# Altium PCB SCOM_SENSOR_HAT.PcbDoc
Units mm, origin at the board's own origin, x right, y up, seen from the top; angles counter-clockwise.
Board outline 137.1 x 87.1 mm, 2 copper layers (L1, L2), stack 1.58 mm thick; 49 components, 79 nets, 165 pads, 0 vias.
Unrouted connection lines stored in the file: 86.
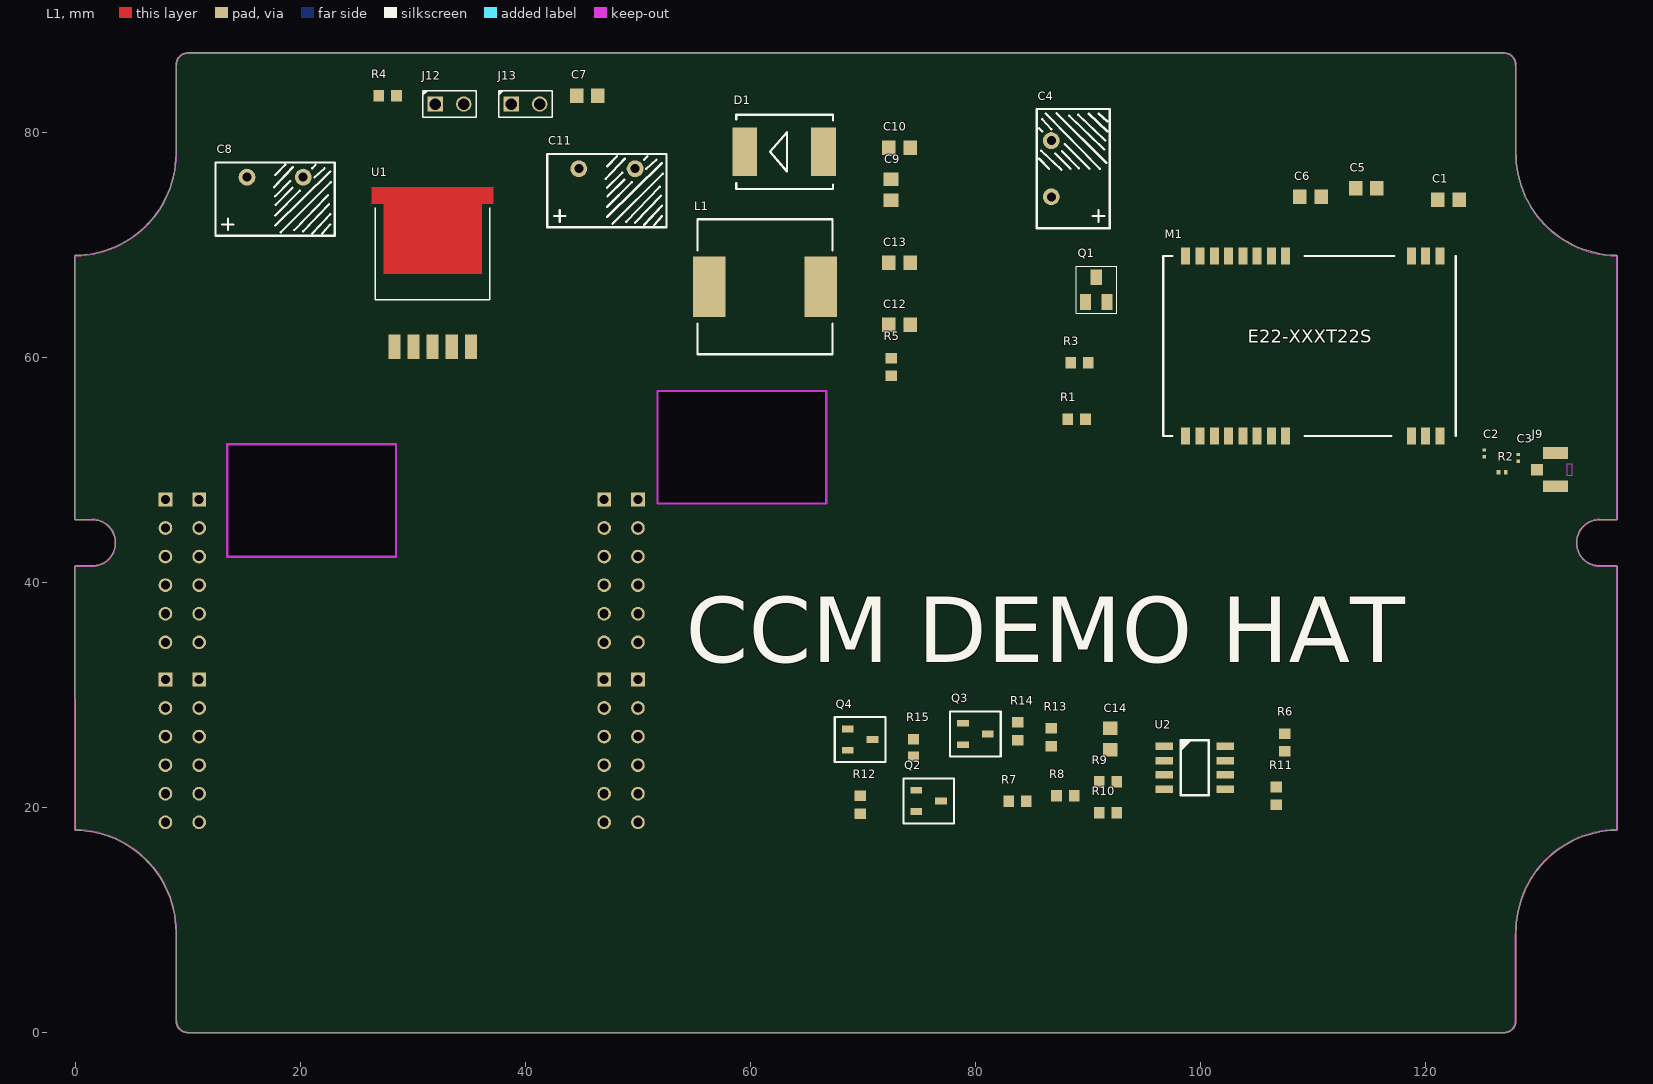
[diagram p0: L1 view]
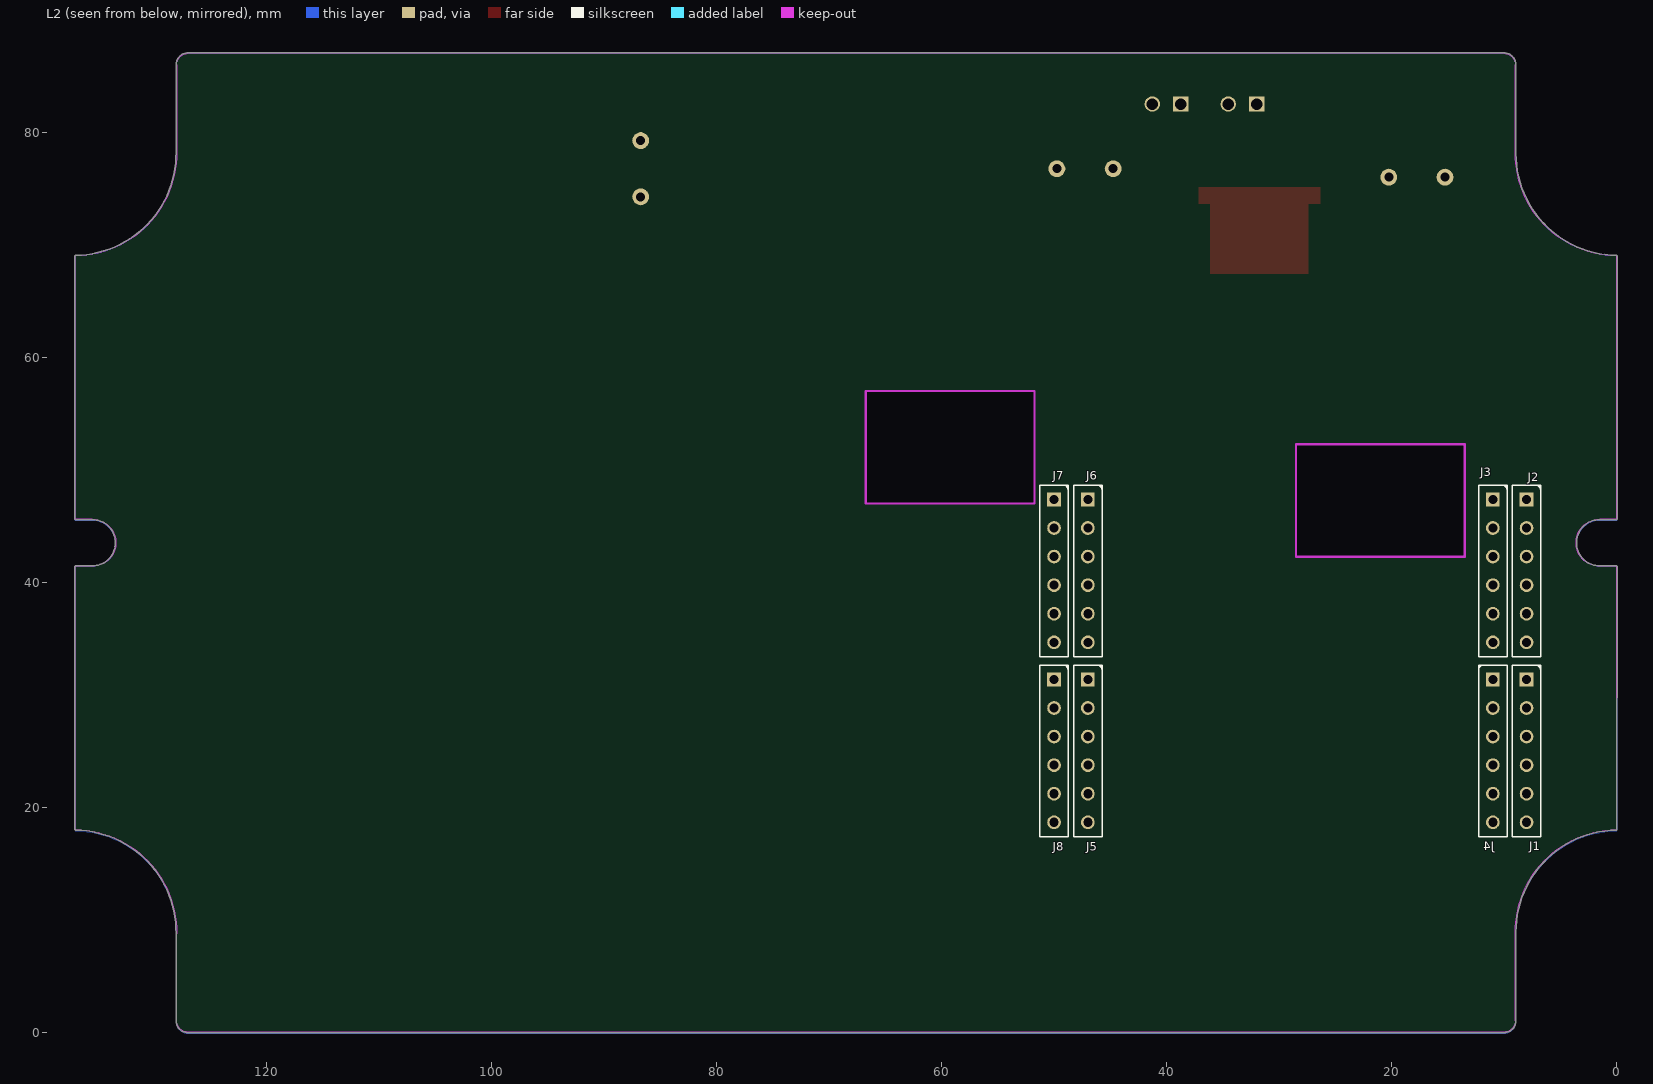
[diagram p1: L2 view, seen from below]

## Layer stack, top to bottom
Top Solder: solder mask 0.01, Solder Resist, Dk 3.5
L1: signal copper 0.035
Core: core 1.51, Core-044, Dk 4
L2: signal copper 0.035
Bottom Solder: solder mask 0.01, Solder Resist, Dk 3.5

## Board outline
-0.004,17.95 -0.05,41.4 0,41.45 1.5,41.45 ccw(c1.5,43.5) 3.55,43.5 ccw(c1.5,43.5) 1.5,45.55 0,45.55 -0.053,45.603 -0.053,69 -0.004,69.05 ccw(c-0.126,78.123) 8.947,78.124 8.947,78.247 8.947,85.997 8.95,86.014 cw(c10,86) 10,87.05 127,87.05 cw(c127,86) 128.05,86.014 128.053,85.997 128.054,78.247 ccw(c137.126,78.123) 137.003,69.051 137.05,68.983 137.05,45.6 137,45.55 135.5,45.55 ccw(c135.5,43.5) 135.5,41.45 137,41.45 137.05,41.4 137.05,18.017 137.004,17.95 ccw(c137.126,8.877) 128.053,8.754 128.053,1.003 128.05,0.986 cw(c127,1) 127,-0.05 10,-0.05 cw(c10,1) 8.95,0.986 8.947,1.003 8.947,8.753 8.947,8.877 ccw(c-0.126,8.877)
cut-out: 13.502,52.25 28.499,52.25 28.499,42.25 13.502,42.25
cut-out: 51.753,57 66.75,57 66.75,47 51.753,47

## Design rules (kind name [scope] priority, off if disabled: settings)
Clearance [All] p1: gap=0.254 ignorepadtopadclearanceinfootprint=FALSE except(0.178: Track-Track Track-SMDPad SMDPad-SMDPad; 0.5: Arc-Poly Track-Poly SMDPad-Poly; 1: THPad-Poly Poly-Poly Poly-Region)
Height [All] p1: minheight=0 maxheight=55 prefheight=12.7
PolygonConnect [All] p1: connectstyle=Relief reliefconductorwidth=0.254 reliefentries=4 polygonreliefangle="90 Angle" airgapwidth=0.254
RoutingVias [All] p1: holewidth=0.711 width=1.27 viastyle="Through Hole" minholewidth=0.1 minwidth=0.1 maxholewidth=0.711 maxwidth=1.27
SolderMaskExpansion [All] p1: expansion=0.102 istentingtop=FALSE
SupplyNets "Schematic Supply Nets_3" [InNet('3V3')] p1: voltage=0.000
SupplyNets "Schematic Supply Nets_2" [InNet('12V0')] p2: voltage=0.000
SupplyNets "Schematic Supply Nets_1" [InNet('5V0')] p3: voltage=0.000
SupplyNets "Schematic Supply Nets" [InNet('GND')] p4: voltage=0.000
Width "Schematic Width Constraint" [InNet('NetC3_2')] p1: maxlimit=3.122 minlimit=3.122 preferedwidth=3.122 impedanceprofiledriven=TRUE impedanceprofileid={AFE54EE7-AFA3-4271-A65C-77413E7DE045} impedanceprofilevalue=50.000000 minimp=50.000000 maximp=50.000000 favimp=50.000000
Width [All] p2: maxlimit=2 minlimit=0.254 preferedwidth=0.5
29 further rules are at their usual default settings.

## Classes and differential pairs
net class U2_Nets: 5V0 485_A 485_B GND NetQ2_3 NetQ3_3 NetQ4_3
net class R15_Nets: 485_B GND
net class R14_Nets: 485_A 485_B
net class R13_Nets: 3V3 485_RX
net class R12_Nets: 3V3 485_TE
net class R11_Nets: 5V0 485_A
net class R10_Nets: 5V0 NetQ2_3
net class R9_Nets: 5V0 NetQ3_3
net class R8_Nets: 5V0 NetQ3_3
net class R7_Nets: 5V0 NetQ4_3
net class R6_Nets: 3V3 485_TX
net class Q4_Nets: 3V3 485_RX NetQ4_3
net class Q3_Nets: 3V3 485_TE NetQ3_3
net class Q2_Nets: 3V3 485_TX NetQ2_3
net class C14_Nets: 5V0 GND
component class RS485: C14 Q2 Q3 Q4 R6 R7 R8 R9 R10 R11 R12 R13 R14 R15 U2
net class U1_Nets: GND NetC7_1 NetC7_2 NetD1_1 NetR4_2
net class R5_Nets: GND NetR4_2
net class R4_Nets: NetC11_1 NetR4_2
net class L1_Nets: NetC11_1 NetD1_1
net class J13_Nets: 5V0 NetC11_1
net class J12_Nets: 12V0 NetC7_1
net class D1_Nets: GND NetD1_1
net class C13_Nets: GND NetC11_1
net class C12_Nets: GND NetC11_1
net class C11_Nets: GND NetC11_1
net class C10_Nets: GND NetC7_1
net class C9_Nets: GND NetC7_1
net class C8_Nets: GND NetC7_1
net class C7_Nets: NetC7_1 NetC7_2
net class R3_Nets: LORA_RST NetQ1_1
net class R2_Nets: LORA_ANT NetC3_2
net class R1_Nets: 5V0 NetC1_1
net class Q1_Nets: GND NetC1_1 NetQ1_1
net class M1_Nets: 5V0 GND LORA_ANT LORA_AUX LORA_M0 LORA_M1 LORA_RXD LORA_TXD NetC1_1 NetM1_3 NetM1_4 NetM1_5 NetM1_6 NetM1_7
net class J9_Nets: GND NetC3_2
net class C6_Nets: 5V0 GND
net class C5_Nets: 5V0 GND
net class C4_Nets: 5V0 GND
net class C3_Nets: GND NetC3_2
net class C2_Nets: GND LORA_ANT
net class C1_Nets: GND NetC1_1
net class ANT_50R: NetC3_2
component class LORA: C1 C2 C3 C4 C5 C6 J9 M1 Q1 R1 R2 R3
net class J8_Nets: NetJ8_1 NetJ8_2 NetJ8_3 NetJ8_4 NetJ8_5 NetJ8_6
net class J7_Nets: NetJ7_1 NetJ7_2 NetJ7_3 NetJ7_4 NetJ7_5 NetJ7_6
net class J6_Nets: NetJ6_1 NetJ6_2 NetJ6_3 NetJ6_4 NetJ6_5 NetJ6_6
net class J5_Nets: NetJ5_1 NetJ5_2 NetJ5_3 NetJ5_4 NetJ5_5 NetJ5_6
net class J4_Nets: NetJ4_1 NetJ4_2 NetJ4_3 NetJ4_4 NetJ4_5 NetJ4_6
net class J3_Nets: NetJ3_1 NetJ3_2 NetJ3_3 NetJ3_4 NetJ3_5 NetJ3_6
net class J2_Nets: NetJ2_1 NetJ2_2 NetJ2_3 NetJ2_4 NetJ2_5 NetJ2_6
net class J1_Nets: GND NetJ1_1 NetJ1_2 NetJ1_3 NetJ1_4 NetJ1_5
component class POWER: C7 C8 C9 C10 C11 C12 C13 D1 J1 J2 J3 J4 J5 J6 J7 J8 J12 J13 L1 R4 R5 U1

## Components (designator, comment, footprint, x,y, rotation, side; value= is the part's Value field where it differs from the comment)
C1 "MLCC_0805" CAPC2012X13L 122.05,74 r0 top value=1nF
C2 "ERP_102-1" CAPC0603X03L 125.25,51.45 r90 top value=NM
C3 "ERP_102-1" CAPC0603X03L 128.25,51.05 r90 top value=NM
C4 "ERP_102-2" "CAP_D10_H16_P5 - Flat" 86.75,76.75 r90 top value=220uF
C5 "MLCC_0805" CAPC2012X13L 114.75,75 r0 top value=1uF
C6 "MLCC_0805" CAPC2012X13L 109.8,74.25 r0 top value=100nF
C7 "MLCC_0805" CAPC2012X13L 45.499,83.25 r0 top value=1uF
C8 "ERP_102-2" "CAP_D10_H16_P5 - Flat" 17.75,76 r0 top value=220uF
C9 "MLCC_0805" CAPC2012X13L 72.5,74.88 r90 top value=1uF
C10 "MLCC_0805" CAPC2012X13L 73.25,78.63 r180 top value=100nF
C11 "ERP_102-2" "CAP_D10_H16_P5 - Flat" 47.25,76.75 r0 top value=220uF
C12 "MLCC_0805" CAPC2012X13L 73.25,62.88 r180 top value=1uF
C13 "MLCC_0805" CAPC2012X13L 73.25,68.38 r180 top value=100nF
C14 "MLCC_0805" CAPC2012X13L 92,26.05 r90 top value=100nF
D1 "ERP_104-3" DIOM6959X26L 63,78.25 r0 top value=SS54
J1 "6PX1R_M" 6PX1R_M_STK20 8,25 r90 bottom locked
J2 "6PX1R_M" 6PX1R_M_STK20 8,41 r90 bottom locked
J3 "6PX1R_M" 6PX1R_M_STK20 11,41 r90 bottom locked
J4 "6PX1R_M" 6PX1R_M_STK20 11,25 r90 bottom locked
J5 "6PX1R_M" 6PX1R_M_STK20 47,25 r90 bottom locked
J6 "6PX1R_M" 6PX1R_M_STK20 47,41 r90 bottom locked
J7 "6PX1R_M" 6PX1R_M_STK20 50,41 r90 bottom locked
J8 "6PX1R_M" 6PX1R_M_STK20 50,25 r90 bottom locked
J9 "ERP_148-1" uFL_50R 130.75,50 r270 top
J12 "2PX1R" 2PX1R 33.249,82.5 r0 top
J13 "2PX1R" 2PX1R 39.999,82.5 r0 top
L1 "ERP_103-3" IND_1212 61.3,66.25 r0 top value=47uH
M1 "E22-XXXT22S" E22-XXXT22S 110,61 r0 top value=E22-900T22S
Q1 "ERP_105-1" MMBT2222 90.75,66 r0 top value=MMBT2222A
Q2 "BSS138L" BSS138L 75.85,20.55 r0 top
Q3 "BSS138L" BSS138L 80,26.5 r0 top
Q4 "BSS138L" BSS138L 69.75,26 r0 top
R1 "ERP_101-1" RES_0603 89,54.5 r0 top value=10k
R2 "ERP_101-1" RESC0603X03L 126.825,49.75 r0 top value=0R
R3 "ERP_101-1" RES_0603 89.25,59.5 r0 top value=220R
R4 "ERP_101-1" RES_0603 27.749,83.25 r0 top value=10k
R5 "ERP_101-1" RES_0603 72.5,59.13 r90 top value=3k3
R6 "ERP_101-1" RES_0603 107.5,25.75 r90 top value=10k
R7 "ERP_101-1" RES_0603 83.75,20.5 r0 top value=10k
R8 "ERP_101-1" RES_0603 88,21 r0 top value=10k
R9 "ERP_101-1" RES_0603 91.79,22.25 r0 top value=10k
R10 "ERP_101-1" RES_0603 91.79,19.5 r180 top value=10k
R11 "ERP_101-1" RES_0603 106.75,21 r90 top value=20k
R12 "ERP_101-1" RES_0603 69.75,20.21 r90 top value=10k
R13 "ERP_101-1" RES_0603 86.75,26.21 r90 top value=10k
R14 "ERP_101-1" RES_0603 83.75,26.75 r90 top value=120R
R15 "ERP_101-1" RES_0603 74.5,25.25 r90 top value=20k
U1 "XL4015" XL4015 31.588,68.337 r90 top
U2 "SN75176A" SN75176A 99.5,23.5 r0 top

## Footprints (in the part's own frame and the unit in brackets; to place one, negate y for a bottom-side part, rotate by r counter-clockwise, add the part's x,y. Pads: shape width x height; smd on the part's side, far side on the other; paste and mask are expansions set on the pad)
2PX1R [mm]
  rect 1.37x1.37 hole 1.02: 1(-1.27,0)
  round 1.37 hole 1.02: 2(1.27,0)
  silkscreen extent -2.39,-1.17 2.39,1.17, body extent -2.54,-1.27 2.54,1.27, height 8.77
6PX1R_M_STK20 [mm]
  rect 1.22x1.22 / inner round 1.22 / far side rect 1.22x1.22 hole 0.81: 1(6.35,0)
  round 1.22 hole 0.81: 2(3.81,0) 3(1.27,0) 4(-1.27,0) 5(-3.81,0) 6(-6.35,0)
  silkscreen extent -7.62,-1.27 7.62,1.27, body extent -7.62,-1.2 7.62,1.2, height 18.11
BSS138L [mm]
  rect 1.05x0.6 smd: 1(-1.1,0.95) 2(-1.1,-0.95) 3(1.1,0)
  silkscreen extent -2.25,-2 2.25,2, body extent -1.2,-1.45 1.2,1.45, height 0.95
"CAP_D10_H16_P5 - Flat" [mm]
  round 1.5 hole 0.8: 1(-2.5,0) 2(2.5,0)
  silkscreen extent -5.3,-5.2 5.3,1.3, body extent -4.99,-18 5,1, height 10
CAPC0603X03L [mm] "Chip Capacitor, 2-Leads, Body 0.60x0.30mm, IPC High Density"
  rect 0.3x0.3 smd: 1(-0.3,0) 2(0.3,0)
  body extent -0.32,-0.17 0.32,0.17, height 0.3
CAPC2012X13L [mm] "Chip Capacitor, 2-Leads, Body 2.00x1.25mm, IPC High Density"
  rect 1.2x1.3 smd: 1(-0.95,0) 2(0.95,0)
  body extent -1.05,-0.63 1.05,0.63, height 1.26
DIOM6959X26L [mm] "Molded Diode, 2-Leads, Body 6.86x5.91mm, IPC High Density"
  rect 2.2x4.3 smd: 1(-3.5,0) 2(3.5,0)
  silkscreen extent -4.25,-3.3 4.35,3.3, body extent -3.92,-2.96 4.02,2.96, height 2.62
E22-XXXT22S [mm]
  rect 0.8x1.5 smd: 1(-11.3,-8) 2(-10.03,-8) 3(-8.76,-8) 4(-7.49,-8) 5(-6.22,-8) 6(-4.95,-8) 7(-3.68,-8) 8(-2.41,-8) 11(8.76,-8) 12(10.03,-8) 13(11.3,-8) 14(11.3,8) 15(10.03,8) 16(8.76,8) 19(-2.41,8) 20(-3.68,8) 21(-4.95,8) 22(-6.22,8) 23(-7.49,8) 24(-8.76,8) 25(-10.03,8) 26(-11.3,8)
  silkscreen extent -13.3,-8 12.7,8, body extent -13.25,-8 12.75,8, height 2.2
IND_1212 [mm]
  rect 2.9x5.4 smd: 1(-4.95,0) 2(4.95,0)
  silkscreen extent -6,-6 6,6, body extent -6,-6 6,6, height 8
MMBT2222 [mm]
  rect 1x1.4 smd: 1(-0.95,-1.1) 2(0.95,-1.1) 3(0,1.1)
  silkscreen extent -1.8,-2.1 1.8,2.1, body extent -1.45,-1.2 1.45,1.2, height 1.11
RES_0603 [mm]
  rect 0.94x1.02 smd: 1(-0.79,0) 2(0.79,0)
  body extent -0.8,-0.4 0.8,0.4, height 0.45
RESC0603X03L [mm] "Chip Resistor, 2-Leads, Body 0.60x0.30mm, IPC High Density"
  rect 0.35x0.4 smd: 1(-0.325,0) 2(0.325,0)
  body extent -0.32,-0.17 0.32,0.17, height 0.26
SN75176A [mm]
  rect 1.528x0.65 smd: 1(-2.711,1.905) 2(-2.711,0.635) 3(-2.711,-0.635) 4(-2.711,-1.905) 5(2.711,-1.905) 6(2.711,-0.635) 7(2.711,0.635) 8(2.711,1.905)
  silkscreen extent -1.25,-2.45 1.25,2.45, body extent -3.01,-2.45 3.01,2.45, height 1.63
uFL_50R [mm] "U.FL (UMCC), I-PEX MHFI Connector Receptacle, Male Pin 50 Ohms Surface Mount Solder"
  rect 1.05x2.2 smd: 1(-1.475,0.825) 2(1.475,0.825)
  rect 1x1.1 smd: 3(0,-0.825)
  L1 keep-out region: -0.5,1.825 0.5,1.825 0.5,2.325 -0.5,2.325
  body extent -1.5,-0.67 1.5,2.32, height 1.34
XL4015 [mm] "5A 180KHz 36V Buck DC to DC Converter"
  rect 2.16x1.07 smd: 1(-7.422,3.238) 2(-7.422,1.538) 3(-7.422,-0.162) 4(-7.422,-1.862) 5(-7.422,-3.562)
  round 0.025 smd: 6(2.913,-0.162)
  L1 region: 6.748,-5.562 5.278,-5.562 5.278,-4.512 -0.922,-4.512 -0.922,4.188 5.278,4.188 5.278,5.238 6.748,5.238
  silkscreen extent -3.22,-5.24 4.96,4.92, body extent -7.8,-5.18 6.86,4.98, height 4.83

## Part data
C1 C6 C10 C13 C14: "Chip Capacitor, 2-Leads, Body 2.00x1.25mm, IPC High Density", Package=0805
C2 C3: library part MLCC_0201, "Chip Capacitor, 2-Leads, Body 0.60x0.30mm, IPC High Density", Package=0201
C4 C8 C11: library part CAP_D10_H16_P5, "Electrolytic Capacitor Through Hole D10 P5.0", Package=10X5
C5 C7 C9 C12: "1uF 105 0805 (2012 metric) 50V X7R MLCC SMD", Package=0805
D1: library part SS54, Package=SMC
J1 J2 J3 J4 J5 J6 J7 J8: "6PX1R Male Header"
J9: library part uFL_50R, "uFL_50R", Package=L3W3
L1: library part IND_1212, "IND_1212", Manufacturer 1="Würth Elektronik"
M1: "E22 EByte LoRa Module"
Q1: library part MMBT2222, "MMBT2222A", Package=SOT23
Q2 Q3 Q4: "NMOS", Manufacturer 1=ON, Manufacturer Part Number 1=BSS138LT1G, Package=SOT23-3
R1 R3: library part RES_0603, "RES_0603", Package=0603
R2: library part RES_0201, "RES_0201", Package=0201
R4 R5 R6 R7 R8 R9 R10 R11 R12 R13 R14 R15: library part RES_0603, "RES_0603", Manufacturer Part Number 1=560112116003, Package=0603
U1: "5A 180KHz 36V Buck DC to DC Converter", Manufacturer 1=XLSemi, Manufacturer Part Number 1=XL4015E1
U2: "RS485/422 Driver IC"

## Nets (pads, with @x,y where several pads share a name; then routed paths per layer and width w, separated by ;. In a path a pad name is that pad's centre, name@x,y a point inside that pad or via, vN(x,y) a via of type N, cw(c..) or ccw(c..) an arc to the next point about the centre after c; other vN are vias at no path point)
3V3: Q2.1 Q3.1 Q4.1 R6.1 R12.1 R13.1
5V0: C4.1 C5.1 C6.1 C14.1 J13.2 M1.25 R1.2 R7.1 R8.1 R9.1 R10.1 R11.1 U2.8
12V0: J12.1
485_A: R11.2 R14.2 U2.6
485_B: R14.1 R15.1 U2.7
485_RX: Q4.2 R13.2
485_TE: Q3.2 R12.2
485_TX: Q2.2 R6.2
GND: C1.2 C2.1 C3.1 C4.2 C5.2 C6.2 C8.2 C9.2 C10.2 C11.2 C12.2 C13.2 C14.2 D1.2 J1.6 J9.1 J9.2 M1.2 M1.8 M1.11 M1.13 M1.14 M1.15 M1.16 M1.19 M1.26 Q1.2 R5.2 R15.2 U1.1 U2.5
LORA_ANT: C2.2 M1.12 R2.2
LORA_AUX: M1.24
LORA_M0: M1.20
LORA_M1: M1.21
LORA_RST: R3.2
LORA_RXD: M1.22
LORA_TXD: M1.23
NetC1_1: C1.1 M1.1 Q1.3 R1.1
NetC3_2: C3.2 J9.3 R2.1
NetC7_1: C7.1 C8.1 C9.1 C10.1 J12.2 U1.5
NetC7_2: C7.2 U1.4
NetC11_1: C11.1 C12.1 C13.1 J13.1 L1.2 R4.1
NetD1_1: D1.1 L1.1 U1.3 U1.6
NetJ1_1: J1.1
NetJ1_2: J1.2
NetJ1_3: J1.3
NetJ1_4: J1.4
NetJ1_5: J1.5
NetJ2_1: J2.1
NetJ2_2: J2.2
NetJ2_3: J2.3
NetJ2_4: J2.4
NetJ2_5: J2.5
NetJ2_6: J2.6
NetJ3_1: J3.1
NetJ3_2: J3.2
NetJ3_3: J3.3
NetJ3_4: J3.4
NetJ3_5: J3.5
NetJ3_6: J3.6
NetJ4_1: J4.1
NetJ4_2: J4.2
NetJ4_3: J4.3
NetJ4_4: J4.4
NetJ4_5: J4.5
NetJ4_6: J4.6
NetJ5_1: J5.1
NetJ5_2: J5.2
NetJ5_3: J5.3
NetJ5_4: J5.4
NetJ5_5: J5.5
NetJ5_6: J5.6
NetJ6_1: J6.1
NetJ6_2: J6.2
NetJ6_3: J6.3
NetJ6_4: J6.4
NetJ6_5: J6.5
NetJ6_6: J6.6
NetJ7_1: J7.1
NetJ7_2: J7.2
NetJ7_3: J7.3
NetJ7_4: J7.4
NetJ7_5: J7.5
NetJ7_6: J7.6
NetJ8_1: J8.1
NetJ8_2: J8.2
NetJ8_3: J8.3
NetJ8_4: J8.4
NetJ8_5: J8.5
NetJ8_6: J8.6
NetM1_3: M1.3
NetM1_4: M1.4
NetM1_5: M1.5
NetM1_6: M1.6
NetM1_7: M1.7
NetQ1_1: Q1.1 R3.1
NetQ2_3: Q2.3 R10.2 U2.1
NetQ3_3: Q3.3 R8.2 R9.2 U2.2 U2.3
NetQ4_3: Q4.3 R7.2 U2.4
NetR4_2: R4.2 R5.1 U1.2

## Polygon pours and split planes (outlines as drawn)
GND on L1 "NONET_L-01_P-001" (solid, pour order 14): -0.05,17.967 -0.05,41.35 0,41.4 1.5,41.4 1.501,41.4 ccw(c1.5,43.45) 3.55,43.45 ccw(c1.5,43.45) 1.5,45.499 0,45.499 -0.053,45.553 -0.053,68.95 -0.003,69 ccw(c-0.126,78.073) 8.948,78.073 8.947,78.197 8.947,85.947 8.95,85.964 cw(c10,85.95) 10,87 127,87 127.001,87 cw(c127,85.95) 128.051,85.964 128.054,85.947 128.054,78.196 ccw(c137.126,78.073) 137.004,69.001 137.051,68.933 137.051,45.55 137,45.499 135.5,45.499 ccw(c135.5,43.45) 135.5,41.4 137,41.4 137.051,41.35 137.051,17.967 137.004,17.899 ccw(c137.127,8.826) 128.054,8.704 128.054,8.703 128.054,0.953 128.051,0.935 cw(c127,0.95) 127,-0.101 10,-0.101 cw(c10,0.95) 8.95,0.935 8.947,0.953 8.947,8.703 8.948,8.826 ccw(c-0.126,8.826)
GND on L2 "NONET_L-01_P-001" (solid, pour order 15): -0.05,17.967 -0.05,41.35 0,41.4 1.5,41.4 1.501,41.4 ccw(c1.5,43.45) 3.55,43.45 ccw(c1.5,43.45) 1.5,45.499 0,45.499 -0.053,45.553 -0.053,68.95 -0.003,69 ccw(c-0.126,78.073) 8.948,78.073 8.947,78.197 8.947,85.947 8.95,85.964 cw(c10,85.95) 10,87 127,87 127.001,87 cw(c127,85.95) 128.051,85.964 128.054,85.947 128.054,78.196 ccw(c137.126,78.073) 137.004,69.001 137.051,68.933 137.051,45.55 137,45.499 135.5,45.499 ccw(c135.5,43.45) 135.5,41.4 137,41.4 137.051,41.35 137.051,17.967 137.004,17.899 ccw(c137.127,8.826) 128.054,8.704 128.054,8.703 128.054,0.953 128.051,0.935 cw(c127,0.95) 127,-0.101 10,-0.101 cw(c10,0.95) 8.95,0.935 8.947,0.953 8.947,8.703 8.948,8.826 ccw(c-0.126,8.826)

## Keep-outs
Keep-Out Layer:
  lines w0.1: -0.003,18 cw(c-0.126,8.877) 8.997,8.753 8.997,1.003 ; -0.003,45.603 -0.003,69 ccw(c-0.126,78.124) 8.997,78.247 8.997,85.997 ; 0,18.003 0,41.4 1.5,41.4 ccw(c1.5,43.5) 1.5,45.6 0,45.6 ; 9,1 ccw(c10,1) 10,0 127,0 ccw(c127,1) 128,1 ; 9,86 cw(c10,86) 10,87 127,87 cw(c127,86) 128,86 ; 128.003,1.003 128.003,8.753 cw(c137.126,8.877) 137.003,18 ; 128.003,85.997 128.003,78.247 ccw(c137.126,78.123) 137.003,69 ; 137,18.003 137,41.4 135.5,41.4 cw(c135.5,43.5) 135.5,45.6 137,45.6 137,68.998 ; 137.003,69 137.003,69
  lines w0.2: 13.5,42.25 13.5,45.625 13.5,52.25 28.5,52.25 28.5,42.25 13.5,42.25 ; 51.75,47 66.75,47 66.75,57 51.75,57 51.75,50.375 51.75,47

## Silkscreen, mask and mechanical layers (free items; w line width, h text height)
Top Overlay:
  text "CCM DEMO HAT" at 54.247,30.963 h10
Dimensions:
  lines w0.1: 0,0 0,0